# EAGLE board ch32v307_feather_v9 (EAGLE 9.7.0)
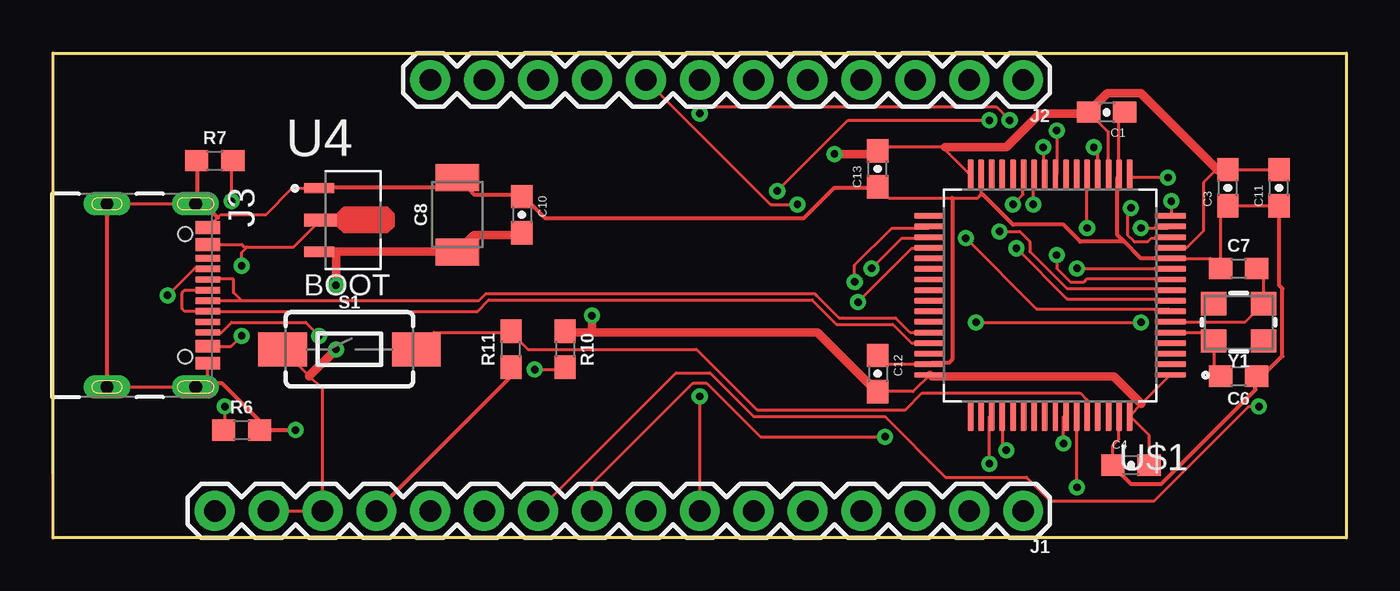
[diagram p0: board, top side]
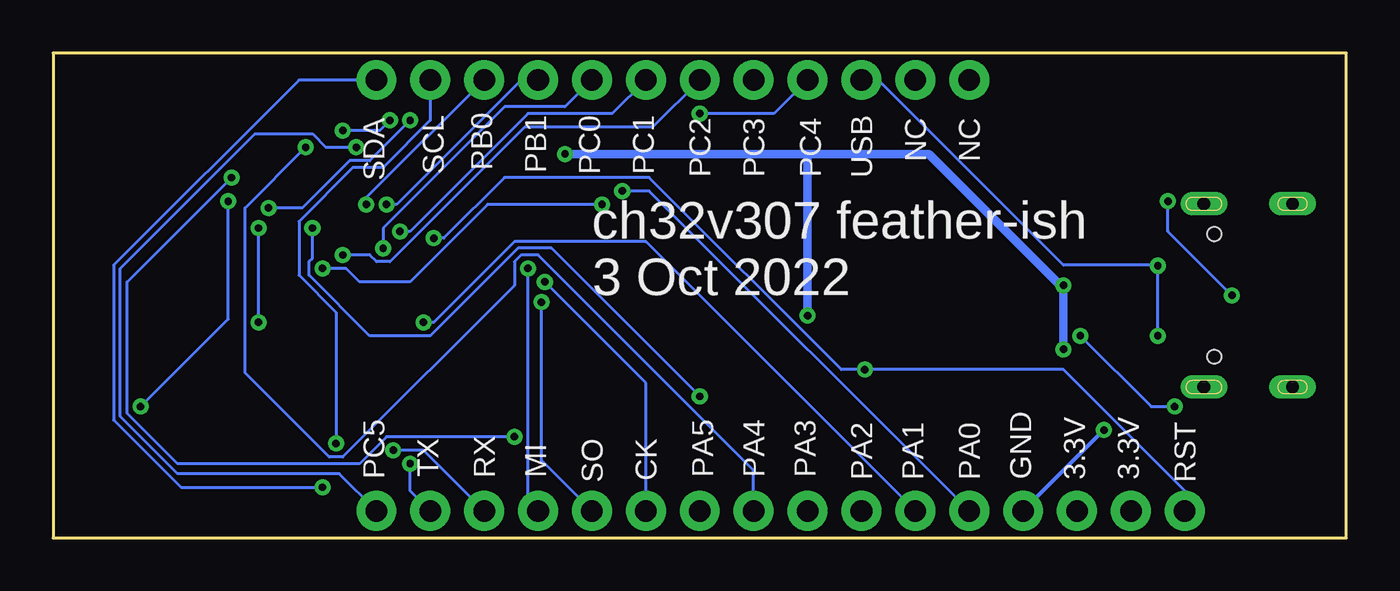
[diagram p1: board, bottom side, seen from below]

Size 60.96 x 22.86 mm. Coordinates in mm from the lower left corner, seen from the top.
Outline: 0,0 0,22.86 60.96,22.86 60.96,0 0,0
Copper layers (1*16): Top 0.035mm / dielectric 1.5mm / Bottom 0.035mm
Design rules "default *": minimum track width 6mil, minimum drill 0.35mm, track to track 6mil, track to pad 6mil, pad to pad 6mil, via to via 6mil, smd to smd 6mil, copper to edge 40mil, drill to drill 6mil, minimum pad ring 10mil, minimum via ring 8mil, stop-mask expansion 4mil, vias tented up to drill 25mil, thermal gap 10mil
Net classes: 1 power: width 0.178 mm; 3 PWR: width 0.406 mm

## Footprints (pad centres in the part's own frame; a part is rotated, then mirrored left to right if it is on the bottom)
0603-CAP = smd 1.1 x 1: 1 -0.85,0; 2 0.85,0
0603 = smd 1.1 x 1: 1 -0.85,0; 2 0.85,0
1210 = smd 1.27 x 2.06: 1 -1.755,0; 2 1.755,0
1X16 = drill 1.016 pad 1.88: 1 0,0; 2 2.54,0; 3 5.08,0; 4 7.62,0; 5 10.16,0; 6 12.7,0; 7 15.24,0; 8 17.78,0; 9 20.32,0; 10 22.86,0; 11 25.4,0; 12 27.94,0; 13 30.48,0; 14 33.02,0; 15 35.56,0; 16 38.1,0
1X12 = drill 1.016 pad 1.88: 1 0,0; 2 2.54,0; 3 5.08,0; 4 7.62,0; 5 10.16,0; 6 12.7,0; 7 15.24,0; 8 17.78,0; 9 20.32,0; 10 22.86,0; 11 25.4,0; 12 27.94,0
GCT_USB4105_REVA = smd 0.6 x 1.15: A1/B12 -3.2,4.755; A4/B9 -2.4,4.755; B1/A12 3.2,4.755; B4/A9 2.4,4.755 | smd 0.3 x 1.15: A5 -1.25,4.755; A6 -0.25,4.755; A7 0.25,4.755; A8 1.25,4.755; B5 1.75,4.755; B6 0.75,4.755; B7 -0.75,4.755; B8 -1.75,4.755 | drill 0.6 pad 1 long: G1 -4.32,0; G2 4.32,0 | drill 0.6 pad 1.05 long: G3 -4.32,4.18; G4 4.32,4.18 | hole 0.65: 2.89,3.68; -2.89,3.68
TACTILE_SWITCH_SMD_6.0X3.5MM = smd 2.3 x 1.6: 1 -3.15,0; 2 3.15,0
REG_MCP1702T-3302E/MB = smd 1.4 x 0.48: 1 -1.425,1.5; 3 -1.425,-1.5 | smd 1.525 x 0.56: 2 -1.365,0
LQFP64M = smd 1.47 x 0.28: 1 -5.67,3.75; 2 -5.67,3.25; 3 -5.67,2.75; 4 -5.67,2.25; 5 -5.67,1.75; 6 -5.67,1.25; 7 -5.67,0.75; 8 -5.67,0.25; 9 -5.67,-0.25; 10 -5.67,-0.75; 11 -5.67,-1.25; 12 -5.67,-1.75; 13 -5.67,-2.25; 14 -5.67,-2.75; 15 -5.67,-3.25; 16 -5.67,-3.75; 33 5.67,-3.75; 34 5.67,-3.25; 35 5.67,-2.75; 36 5.67,-2.25; 37 5.67,-1.75; 38 5.67,-1.25; 39 5.67,-0.75; 40 5.67,-0.25; 41 5.67,0.25; 42 5.67,0.75; 43 5.67,1.25; 44 5.67,1.75; 45 5.67,2.25; 46 5.67,2.75; 47 5.67,3.25; 48 5.67,3.75 | smd 0.28 x 1.47: 17 -3.75,-5.67; 18 -3.25,-5.67; 19 -2.75,-5.67; 20 -2.25,-5.67; 21 -1.75,-5.67; 22 -1.25,-5.67; 23 -0.75,-5.67; 24 -0.25,-5.67; 25 0.25,-5.67; 26 0.75,-5.67; 27 1.25,-5.67; 28 1.75,-5.67; 29 2.25,-5.67; 30 2.75,-5.67; 31 3.25,-5.67; 32 3.75,-5.67; 49 3.75,5.67; 50 3.25,5.67; 51 2.75,5.67; 52 2.25,5.67; 53 1.75,5.67; 54 1.25,5.67; 55 0.75,5.67; 56 0.25,5.67; 57 -0.25,5.67; 58 -0.75,5.67; 59 -1.25,5.67; 60 -1.75,5.67; 61 -2.25,5.67; 62 -2.75,5.67; 63 -3.25,5.67; 64 -3.75,5.67
CRYSTAL-SMD-3.2X2.5MM = smd 1.2 x 1.1: 1 -1.175,-0.875; 2 1.175,-0.875; 3 1.175,0.875; 4 -1.175,0.875

## Placement (x,y rotation side)
C1  0.1uF  [0603-CAP]  49.66,20.07 180 top
C3  0.1uF  [0603-CAP]  55.37,16.51 90 top
C4  0.1uF  [0603-CAP]  50.8,3.43 0 top
C6  9.0pF  [0603]  55.88,7.62 180 top
C7  9.0pF  [0603]  55.88,12.7 0 top
C8  10uF  [1210]  19.05,15.24 90 top
C10  0.1uF  [0603-CAP]  22.1,15.24 270 top
C11  0.1uF  [0603-CAP]  57.78,16.51 90 top
C12  0.1uF  [0603-CAP]  38.86,7.75 270 top
C13  0.1uF  [0603-CAP]  38.86,17.4 90 top
J1  [1X16]  45.72,1.27 180 top
J2  [1X12]  45.72,21.59 180 top
J3  USB4105_REVA  [GCT_USB4105_REVA]  2.54,11.43 270 top
R6  5.1k  [0603]  8.89,5.08 0 top
R7  5.1k  [0603]  7.62,17.78 0 top
R10  10k  [0603]  24.13,8.89 270 top
R11  10k  [0603]  21.59,8.89 90 top
S1  MOMENTARY-SWITCH-SPST-SMD-6.0X3.5MM  [TACTILE_SWITCH_SMD_6.0X3.5MM]  13.97,8.89 0 top
U4  MCP1702T-3302E/MB  [REG_MCP1702T-3302E/MB]  13.97,14.99 0 top
U$1  CH32V307RCT6  [LQFP64M]  46.99,11.43 180 top
Y1  [CRYSTAL-SMD-3.2X2.5MM]  55.88,10.16 180 top

## Library data of the parts
C1 C3 C4 C10-C13 = SparkFun-Capacitors
C6 C7 = SparkFun-Capacitors; PROD_ID: CAP-09341
C8 = SparkFun-Capacitors; PROD_ID: CAP-09824
J1 J2 = SparkFun-Connectors
J3 = USB4105_REVA; MANUFACTURER: GCT; MAXIMUM_PACKAGE_HEIGHT: 3.31 mm; PARTREV: 0.2; STANDARD: Manufacturer Recommendations
R6 R7 = SparkFun-Resistors
R10 R11 = SparkFun-Resistors; PROD_ID: RES-00824
S1 = SparkFun-Switches; PROD_ID: SWCH-00815; SF_SKU: COM-08229
U4 = MCP1702T-3302E_MB; MANUFACTURER: Microchip; MAXIMUM_PACKAGE_HEIGHT: 1.6mm; PARTREV: E; STANDARD: Manufacturer recommendations
U$1 = wch32v307
Y1 = SparkFun-Clocks

## Nets
3.3V [PWR]: C1.2 C3.2 C4.2 C8.1 C10.2 C11.2 C12.2 C13.2 J1.14 J1.15 R10.1 S1.1 U4.3 U$1.1 U$1.13 U$1.19 U$1.32 U$1.48 U$1.64
5: J2.3 U$1.26
6: J2.4 U$1.27
9: J2.5 U$1.8
10: J2.6 U$1.9
11: J2.7 U$1.10
12: J2.8 U$1.11
13: J2.9 U$1.24
A0: J1.12 U$1.14
A1: J1.11 U$1.15
A2: J1.10 U$1.16
A3: J1.9 U$1.17
A4: J1.8 U$1.20
A5: J1.7 U$1.21
BAT: J2.12
BOOT0: R11.2 S1.2 U$1.60
D_N: J3.A7 J3.B7 U$1.44
D_P: J3.A6 J3.B6 U$1.45
DEBUG_RX: J1.3 U$1.52
DEBUG_TX: J1.2 U$1.51
EN: J2.11
GND [power]: C1.1 C3.1 C4.1 C6.1 C7.1 C8.2 C10.1 C11.1 C12.1 C13.1 J1.13 J3.A1/B12 J3.B1/A12 J3.G1 J3.G2 J3.G3 J3.G4 R6.2 R7.1 R11.1 U4.1 U$1.12 U$1.18 U$1.31 U$1.47 U$1.63
KEY: J1.1 U$1.25
LED1: U$1.41
LED2: U$1.50
MISO: J1.4 U$1.35
MOSI: J1.5 U$1.36
N$1: C6.2 U$1.5 Y1.3
N$3: C7.2 U$1.6 Y1.1
N$4: U$1.33
N$6: J3.B5 R6.1
N$7: J3.A5 R7.2
RST: J1.16 R10.2 U$1.7
RXN: U$1.38
RXP: U$1.37
SCK: J1.6 U$1.34
SCL: J2.2 U$1.58
SDA: J2.1 U$1.59
SWCLK: U$1.49
SWDIO: U$1.46
TXN: U$1.40
TXP: U$1.39
USB_5V: J2.10 J3.A4/B9 J3.B4/A9 U4.2

## Tracks (layer width: path | path; a pad name or v marks a point on that pad's centre or on a via)
3.3V  (via drill 0.35)
  Top 0.152: U$1.13 53.43,13.68 54.23,14.48 54.23,16.76 54.83,17.36 C3.2 C11.2 | U$1.1 51.3,6.32 U$1.64 51.65,4.85 C4.2 | U$1.48 40.54,6.9 C12.2 | U$1.32 42.04,18.3 42.04,18.41 39.03,18.41 C13.2 | U$1.19 49.74,19.13 C1.2 | J1.15 J1.14 12.7,7.01 12.08,7.63 S1.1
  Top 0.406: 25.4,9.68 36.04,9.68 38.73,6.99 C12.2 | 25.4,9.68 24.13,9.68 R10.1 | 51.3,6.32 50.01,7.62 41.43,7.62 U$1.48 | 42.04,18.41 44.93,18.41 46.51,20 48.74,20 C1.2 48.9,20.16 49.69,20.95 51.28,20.95 54.93,17.3 C3.2 | C10.2 22.07,14.29 19.84,14.29 19.05,13.49 C8.1 18.89,13.49 13.34,13.49 | 13.34,13.49 12.7,13.49 U4.3 | v13.34,11.91 13.34,13.49 | v13.34,8.89 12.08,7.63 12.06,7.62 | v36.83,18.1 38.73,18.1 C13.2 | v25.4,10.48 25.4,9.68
  Bottom 0.406: v13.34,8.89 v13.34,11.91 13.49,11.91 19.68,18.1 25.4,18.1 | 25.4,18.1 v36.83,18.1 | 25.4,18.1 v25.4,10.48
5  (via drill 0.35)
  Top 0.152: v46.2,15.72 46.2,16.99 U$1.26
  Bottom 0.152: v46.2,15.72 46.2,16.03 J2.3
6  (via drill 0.35)
  Top 0.152: v45.24,15.72 45.72,16.19 45.72,16.99 U$1.27
  Bottom 0.152: v45.24,15.72 44.77,15.72 38.89,21.59 J2.4
9  (via drill 0.35)
  Top 0.152: v45.4,13.65 47.78,11.27 52.55,11.27 U$1.8
  Bottom 0.152: v45.4,13.65 45.4,14.61 39.69,20.32 36.83,20.32 J2.5
10  (via drill 0.35)
  Top 0.152: v44.61,14.45 45.56,14.45 46.04,13.97 46.04,13.49 47.78,11.75 52.55,11.75 U$1.9
  Bottom 0.152: v44.61,14.45 44.13,14.45 38.58,20 34.61,20 J2.6
11  (via drill 0.35)
  Top 0.152: v47.31,13.34 47.31,12.7 47.94,12.06 48.58,12.06 48.74,12.22 52.55,12.22 U$1.10
  Bottom 0.152: v47.31,13.34 46.04,13.34 45.72,13.02 45.09,13.02 38.73,19.37 32.7,19.37 J2.7
12  (via drill 0.35)
  Top 0.152: v48.26,12.7 52.55,12.7 U$1.11 | v35.08,15.72 33.81,15.72 J2.8
  Bottom 0.152: v48.26,12.7 47.15,12.7 46.51,12.06 44.13,12.06 40.48,15.72 v35.08,15.72
13  (via drill 0.35)
  Top 0.152: v47.31,19.21 47.31,17.14 U$1.24 | v45.09,19.68 44.45,20.32 30.8,20.32 v30.48,20
  Bottom 0.152: v47.31,19.21 45.56,19.21 v45.09,19.68 | v30.48,20 26.99,20 J2.9
A0  (via drill 0.35)
  Top 0.152: v50.8,15.56 50.64,15.4 50.64,14.29 50.96,13.97 51.59,13.97 51.75,14.13 52.55,14.13 U$1.14 | v44.13,19.68 37.47,19.68 v34.13,16.35
  Bottom 0.152: v50.8,15.56 49.21,15.56 46.99,17.78 46.04,17.78 v44.13,19.68 | v34.13,16.35 32.86,16.35 J1.12
A1  (via drill 0.35)
  Top 0.152: v51.28,14.61 52.55,14.61 U$1.15 | v43.5,10.16 v51.28,10.16
  Bottom 0.152: v51.28,10.16 v51.28,14.61 | v43.5,10.16 43.02,10.16 39.21,13.97 33.02,13.97 J1.11
A2  (via drill 0.35)
  Top 0.152: v52.7,15.88 52.7,15.24 U$1.16 | v56.83,6.19 56.36,6.19 51.91,1.75 46.99,1.75 45.88,2.86 42.07,2.86 39.21,5.71 33.02,5.71 30.96,7.78 29.37,7.78 J1.10
  Bottom 0.152: v52.7,15.88 52.7,10.32 v56.83,6.19
A3  (via drill 0.35)
  Top 0.152: v52.55,16.99 50.8,16.99 U$1.17 | v39.21,4.76 33.34,4.76 30.8,7.3 30.16,7.3 25.4,2.54 J1.9
  Bottom 0.152: v52.55,16.99 57.47,12.06 57.47,5.87 55.09,3.49 46.51,3.49 45.24,4.76 v39.21,4.76
A4  (via drill 0.35)
  Top 0.152: v49.05,18.41 49.21,18.26 49.21,17.14 U$1.20
  Bottom 0.152: v49.05,18.41 51.91,15.56 51.91,7.78 47.94,3.81 47.31,3.81 39.21,11.91 39.21,13.02 38.89,13.34 38.1,13.34 27.94,3.17 J1.8
A5  (via drill 0.35)
  Top 0.152: v48.74,14.61 48.74,16.99 U$1.21 | J1.7 v30.48,6.67
  Bottom 0.152: v48.74,14.61 48.74,13.18 48.9,13.02 48.9,12.38 46.04,9.53 43.18,9.53 39.05,13.65 37.47,13.65 v30.48,6.67
BOOT0
  Top 0.152: 21.59,9.68 17.94,9.68 17.14,8.89 S1.2 | 21.59,9.68 22.38,8.89 30.32,8.89 33.18,6.03 40.16,6.03 40.96,6.83 48.42,6.83 48.74,6.51 48.74,5.87 U$1.60 | 21.59,9.68 R11.2
D_N
  Top 0.152: J3.A7 8.89,11.18 | 8.89,11.18 20.07,11.18 20.32,11.43 | 20.32,11.43 | 20.32,11.43 20.41,11.52 35.9,11.52 35.99,11.43 | 35.99,11.43 | 35.99,11.43 37.05,10.38 37.22,10.38 37.22,10.37 39.71,10.37 40.4,9.68 U$1.44 | 8.89,11.18 8.51,11.56 8.51,12.19 7.31,12.19 J3.B7
D_P
  Top 0.152: U$1.45 40.46,9.18 39.58,10.06 36.93,10.06 35.78,11.21 20.54,11.21 20,10.68 J3.B6 6.21,10.68 6.1,10.79 6.1,11.56 6.22,11.68 J3.A6
DEBUG_RX  (via drill 0.35)
  Top 0.152: v44.93,4.13 44.77,4.29 44.77,5.71 U$1.52
  Bottom 0.152: v44.93,4.13 43.5,4.13 J1.3
DEBUG_TX  (via drill 0.35)
  Top 0.152: v44.13,3.49 44.13,5.71 U$1.51
  Bottom 0.152: v44.13,3.49 44.13,2.22 J1.2
GND  (via drill 0.35)
  Top 0.152: U$1.12 54.55,13.18 C7.1 55.03,15.32 C3.1 C11.1 | C4.1 49.95,4.36 50.24,4.65 U$1.63 | U$1.47 39.28,8.18 C12.1 | U$1.31 43.74,16.18 43.56,16 42.39,16 39.41,16 C13.1 | U$1.18 50.24,19.8 C1.1 | J3.A1/B12 7.76,15.1 7.91,15.24 10.03,15.24 11.28,16.49 U4.1 | J3.G1 J3.G3 | J3.G2 J3.G4 7.29,7.68 J3.B1/A12
  Top 0.178: U$1.47 41.43,8.26 42.23,8.26 42.39,8.41 42.39,16 42.39,16.03 | 50.48,13.97 51.28,13.18 52.55,13.18 U$1.12 | 50.48,13.97 50.16,14.29 50.16,16.99 U$1.18 | 56.67,7.3 56.67,6.99 52.23,2.54 50.8,2.54 50.01,3.33 C4.1 | 56.67,7.3 56.67,7.62 C6.1 56.67,7.3 | C11.1 57.78,11.91 57.94,11.75 57.94,8.57 56.67,7.3 | 50.48,13.97 48.42,13.97 47.62,14.76 45.24,14.76 43.81,16.19 43.74,16.18 | R11.1 21.59,7.62 J1.13 | J3.G4 6.99,7.3 7.94,7.3 9.68,5.56 9.68,5.08 R6.2 v11.43,5.08 | R7.1 6.83,17.78 6.83,15.88 J3.G3 6.83,15.72 7.14,15.72 7.76,15.1 7.78,15.08 | 19.53,16.51 19.05,16.99 C8.2 19.53,16.51 | 19.53,16.51 19.84,16.19 22.07,16.19 C10.1 22.23,16.03 23.18,15.08 35.4,15.08 36.83,16.51 38.73,16.51 C13.1 | 19.53,16.51 12.7,16.51 U4.1 | J3.G1 J3.G2
  Bottom 0.178: v11.43,5.08 J1.13
KEY  (via drill 0.35)
  Top 0.152: v46.67,18.41 46.67,17.14 U$1.25
  Bottom 0.152: v46.67,18.41 48.1,18.41 48.74,19.05 51.44,19.05 57.78,12.7 57.78,5.71 55.09,3.02 47.47,3.02 J1.1
MISO  (via drill 0.35)
  Top 0.152: v38.58,12.7 40.01,14.13 41.27,14.13 U$1.35
  Bottom 0.152: v38.58,12.7 38.58,1.75 J1.4
MOSI  (via drill 0.35)
  Top 0.152: v37.94,11.11 40.48,13.65 41.27,13.65 U$1.36
  Bottom 0.152: v37.94,11.11 37.94,3.65 J1.5
N$1
  Top 0.152: U$1.5 54.7,9.68 Y1.3 54.7,7.62 C6.2
N$3
  Top 0.152: U$1.6 56.2,10.18 Y1.1 57.05,12.38 C7.2
N$6  (via drill 0.35)
  Top 0.152: v8.1,6.19 8.1,5.08 R6.1 | v12.54,9.53 11.91,10.16 8.41,10.16 7.94,9.68 7.3,9.68 J3.B5
  Bottom 0.152: v8.1,6.19 9.21,6.19 v12.54,9.53
N$7  (via drill 0.35)
  Top 0.152: v8.41,15.88 8.41,17.78 R7.2 | v5.4,11.43 6.67,12.7 7.14,12.7 J3.A5
  Bottom 0.152: v8.41,15.88 8.41,14.45 v5.4,11.43
RST  (via drill 0.35)
  Top 0.152: v22.7,7.94 24.13,7.94 R10.2 | v43.02,14.13 46.35,10.79 52.55,10.79 U$1.7
  Bottom 0.152: J1.16 7.62,2.22 13.34,7.94 v22.7,7.94 23.81,7.94 32.86,16.99 39.69,16.99 42.55,14.13 v43.02,14.13
SCK  (via drill 0.35)
  Top 0.152: v37.78,12.06 37.78,12.86 39.53,14.61 41.27,14.61 U$1.34
  Bottom 0.152: v37.78,12.06 33.02,7.3 J1.6
SCL  (via drill 0.35)
  Top 0.152: v47.62,4.45 47.62,5.71 U$1.58
  Bottom 0.152: v47.62,4.45 47.62,10.64 49.37,12.38 49.37,14.92 46.83,17.46 45.4,17.46 43.18,19.68 J2.2
SDA  (via drill 0.35)
  Top 0.152: v48.26,2.38 48.26,5.71 U$1.59
  Bottom 0.152: v48.26,2.38 54.93,2.38 58.1,5.56 58.1,12.86 49.37,21.59 J2.1
USB_5V  (via drill 0.35)
  Top 0.152: J3.A4/B9 8.9,13.83 9.02,13.72 9.14,13.72 | 9.14,13.72 11.34,13.72 U4.2 | J3.B4/A9 8.39,9.03 v8.89,9.53 | v8.89,12.83 8.89,13.46 9.14,13.72
  Bottom 0.152: v8.89,9.53 v8.89,12.83 8.89,12.86 13.34,12.86 22.07,21.59 J2.10

## Text on the board
tPlace: BOOT
bPlace: NC | NC | USB | PC4 | PC3 | PC2 | PC1 | PC0 | PB1 | PB0 | SCL | SDA | ch32v307 feather-ish / 3 Oct 2022 | 3.3V | 3.3V | GND | PA3 | PA4 | PA5 | PC5 | RST | PA0 | PA1 | PA2 | CK | SO | RX | TX | MI